# Altium PCB PCB1.PcbDoc
Units mil, origin at the board's own origin, x right, y up, seen from the top; angles counter-clockwise.
Board outline 2960 x 1175 mil, 2 copper layers (Top Layer, Bottom Layer); 16 components, 20 nets, 96 pads, 1 vias.
Unrouted connection lines stored in the file: 4.
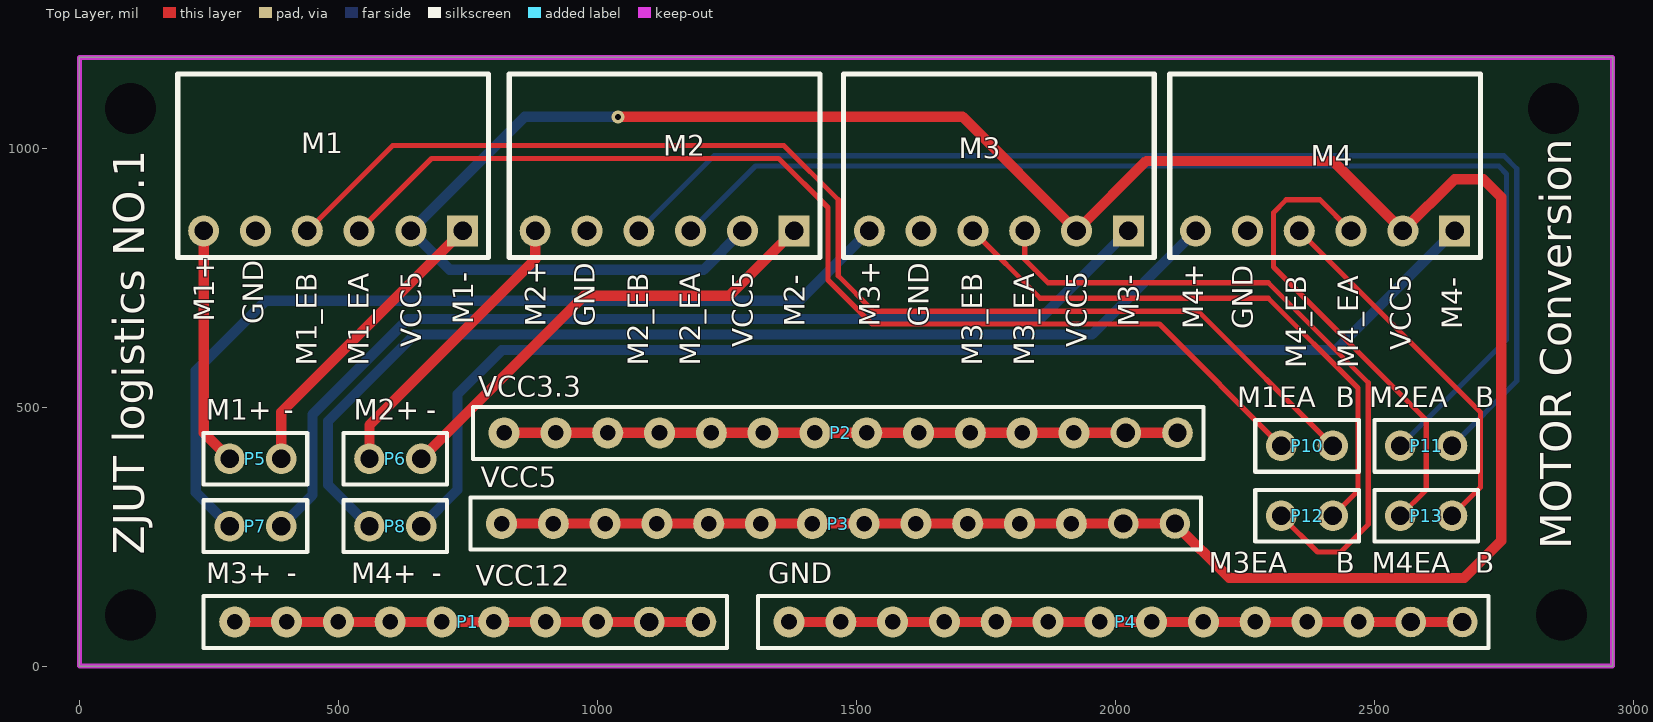
[diagram p0: Top Layer view]
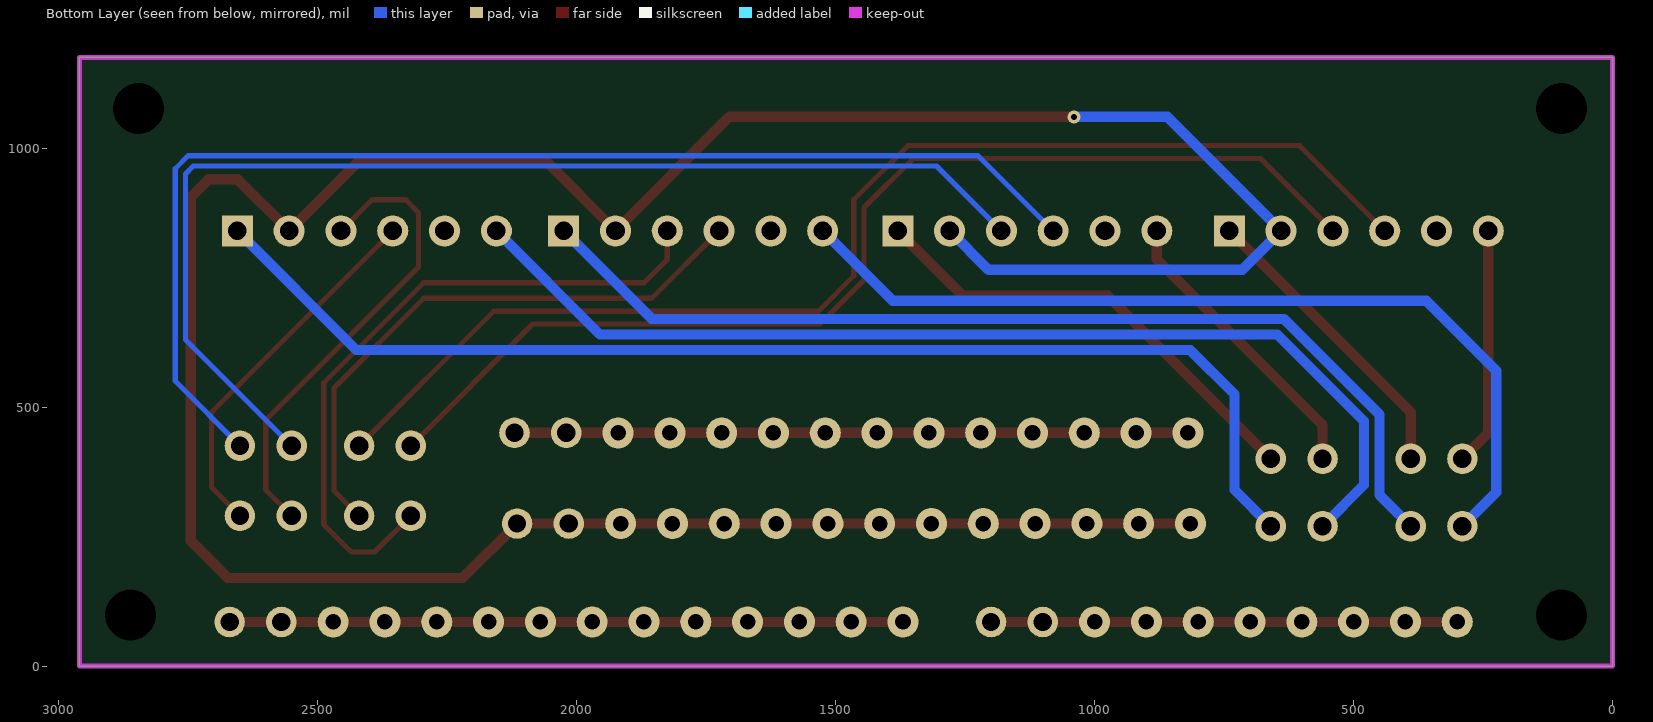
[diagram p1: Bottom Layer view, seen from below]

## Layer stack, top to bottom
Top Solder: solder mask 0.4, Solder Resist, Dk 3.5
Top Layer: signal copper 1.4
Dielectric 1: dielectric 12.6, FR-4, Dk 4.8
Bottom Layer: signal copper 1.4
Bottom Solder: solder mask 0.4, Solder Resist, Dk 3.5

## Board outline
0,0 2960,0 2960,1175 0,1175

## Design rules (kind name [scope] priority, off if disabled: settings)
Clearance [All] p1: gap=10 ignorepadtopadclearanceinfootprint=FALSE except(0: Arc-Hole Track-Hole SMDPad-Hole THPad-Hole Via-Hole Fill-Hole Poly-Hole Region-Hole Text-Hole)
PolygonConnect [All] p1: thpad.connectstyle=Direct thpad.reliefconductorwidth=10 thpad.reliefentries=4 thpad.polygonreliefangle="90 Angle" thpad.airgapwidth=10 smdpad.connectstyle=Relief smdpad.reliefconductorwidth=10 smdpad.reliefentries=4 smdpad.polygonreliefangle="90 Angle" smdpad.airgapwidth=10 via.connectstyle=Direct via.reliefconductorwidth=10 via.reliefentries=4 via.polygonreliefangle="90 Angle" via.airgapwidth=10
RoutingVias [All] p1: holewidth=28 width=50 viastyle="Through Hole" minholewidth=28 minwidth=50 maxholewidth=28 maxwidth=50
SolderMaskExpansion [All] p1: expansion=4 istentingtop=FALSE
Width [All] p1: maxlimit=40 minlimit=5 preferedwidth=10 minimp=50.000000 maximp=50.000000 favimp=50.000000
30 further rules are at their usual default settings.

## Components (designator, comment, footprint, x,y, rotation, side; value= is the part's Value field where it differs from the comment)
M1 "motor" Header6 1130,-111.85 r180 top
M2 "motor" Header6 1770,-111.85 r180 top
M3 "motor" Header6 2415,-111.85 r180 top
M4 "motor" Header6 3045,-111.85 r180 top
P1 "HEADER_10_10" HDR1X10_10 1200,85 r180 top
P2 "HEADER_10" HDR1X10 2120,450 r180 top
P3 "HEADER_10" HDR1X10 2115,275 r180 top
P4 "HEADER_10" HDR1X10 2670,85 r180 top
P5 "HEADER_2" HDR1X2 290,400 r0 top
P6 "HEADER_2" HDR1X2 560,400 r0 top
P7 "HEADER_2" HDR1X2 290,270 r0 top
P8 "HEADER_2" HDR1X2 560,270 r0 top
P10 "HEADER_2" HDR1X2 2320,425 r0 top
P11 "HEADER_2" HDR1X2 2550,425 r0 top
P12 "HEADER_2" HDR1X2 2320,290 r0 top
P13 "HEADER_2" HDR1X2 2550,290 r0 top

## Footprints (in the part's own frame and the unit in brackets; to place one, negate y for a bottom-side part, rotate by r counter-clockwise, add the part's x,y. Pads: shape width x height; smd on the part's side, far side on the other; paste and mask are expansions set on the pad)
HDR1X2 [mm]
  round 1.5 hole 0.9: 1(0,0) 2(2.54,0)
  silkscreen extent -1.27,-1.27 3.81,1.27
HDR1X10 [mil]
  round 59.06 hole 35.43: 1(0,0) 2(100,0)
  round 60 hole 30: 3(200,0) 4(300,0) 5(400,0) 6(500,0) 7(600,0) 8(700,0) 9(800,0) 10(900,0) 11(1000,0) 12(1100,0) 13(1200,0) 14(1300,0)
  silkscreen extent -50,-50 1360,50
HDR1X10_10 [mil]
  round 59.06 hole 35.43: 1(0,0) 2(100,0)
  round 60 hole 30: 3(200,0) 4(300,0) 5(400,0) 6(500,0) 7(600,0) 8(700,0) 9(800,0) 10(900,0)
  silkscreen extent -50,-50 960,50
Header6 [mil]
  rect 60x60 hole 36: 1(390,-951.85)
  round 60 hole 36: 2(490,-951.85) 3(590,-951.85) 4(690,-951.85) 5(790,-951.85) 6(890,-951.85)
  silkscreen extent 340,-1255 940,-901

## Free pads (board coordinates)
  round 60 hole 98.43: 7(98.43,98.43) 7(98.43,1076.57) 7(2845.83,1076.57) 7(2861.57,98.43)

## Via types
v1: diameter 25.59, hole 11.81, Top Layer to Bottom Layer, 1 vias

## Nets (pads, with @x,y where several pads share a name; then routed paths per layer and width w, separated by ;. In a path a pad name is that pad's centre, name@x,y a point inside that pad or via, vN(x,y) a via of type N, cw(c..) or ccw(c..) an arc to the next point about the centre after c; other vN are vias at no path point)
GND: M1.5 M2.5 M3.5 M4.5 P4.1 P4.2 P4.3 P4.4 P4.5 P4.6 P4.7 P4.8 P4.9 P4.10 P4.11 P4.12 P4.13 P4.14 | length 1300
  Top Layer w20: P4.14 P4.13 P4.12 P4.11 P4.10 P4.9 P4.8 P4.7 P4.6 P4.5 P4.4 P4.3 P4.2 P4.1
motor1+: M1.6 P5.1 | length 460.7
  Top Layer w20: M1.6 240,450 P5.1
motor1-: M1.1 P5.2 | length 585
  Top Layer w20: P5.2 390,490 M1.1
motor1_EA: M1.3 P10.1 | length 2149.9
  Top Layer w10: M1.3 680,980 1350,980 1445,885 1445,745 1530,660 2085,660 P10.1
motor1_EB: M1.4 P10.2 | length 2374.5
  Top Layer w10: M1.4 605,1005 1360,1005 1465,900 1465,753.28 1533.28,685 2160,685 P10.2
motor2+: M2.6 P6.1 | length 572.5
  Top Layer w20: P6.1 560,465 880,785 M2.6
motor2-: M2.1 P6.2 | length 902.3
  Top Layer w20: P6.2 975,715 1255,715 M2.1
motor2_EA: M2.3 P11.1 | length 2242.9
  Bottom Layer w10: M2.3 1305,965 2740,965 2755,950 2755,630 P11.1
motor2_EB: M2.4 P11.2 | length 2352.2
  Bottom Layer w10: M2.4 1225,985 2750,985 2775,960 2775,550 P11.2
motor3+: M3.6 P7.1 | length 1738.8
  Bottom Layer w20: P7.1 225,335 225,570 360,705 1390,705 M3.6
motor3-: M3.1 P7.2 | length 1961.9
  Bottom Layer w20: P7.2 450,330 450,485 635,670 1855,670 M3.1
motor3_EA: M3.3 P12.1 | length 1309.8
  Top Layer w10: M3.3 1825,785 1870,740 2295,740 2488.32,546.68 2488.32,273.32 2435,220 2390,220 P12.1
motor3_EB: M3.4 P12.2 | length 1135.7
  Top Layer w10: M3.4 1855,710 2295,710 2468.32,536.68 2468.32,338.32 P12.2
motor4+: M4.6 P8.1 | length 2062.9
  Bottom Layer w20: P8.1 480,350 480,472.57 647.43,640 1955,640 M4.6
motor4-: M4.1 P8.2 | length 2339.5
  Bottom Layer w20: P8.2 730,340 730,525 815,610 2425,610 M4.1
motor4_EA: M4.3 P13.1 | length 913.1
  Top Layer w10: M4.3 2395,900 2330,900 2305,875 2305,770 2600,475 2600,340 P13.1
motor4_EB: M4.4 P13.2 | length 717.8
  Top Layer w10: M4.4 2705,490 2705,345 P13.2
VCC3.3: P2.1 P2.2 P2.3 P2.4 P2.5 P2.6 P2.7 P2.8 P2.9 P2.10 P2.11 P2.12 P2.13 P2.14 | length 1300
  Top Layer w20: P2.14 P2.13 P2.12 P2.11 P2.10 P2.9 P2.8 P2.7 P2.6 P2.5 P2.4 P2.3 P2.2 P2.1
VCC5: M1.2 M2.2 M3.2 M4.2 P3.1 P3.2 P3.3 P3.4 P3.5 P3.6 P3.7 P3.8 P3.9 P3.10 P3.11 P3.12 P3.13 P3.14 | length 5823.6
  Top Layer w20: P3.14 P3.13 P3.12 P3.11 P3.10 P3.9 P3.8 P3.7 P3.6 P3.5 P3.4 P3.3 P3.2 P3.1 2220,170 2673.28,170 2745,241.72 2745,905 2710,940 2655,940 M4.2 2420,975 2060,975 M3.2 1705,1060 v1(1040,1060)
  Bottom Layer w20: v1(1040,1060) 860,1060 M1.2 715,765 1205,765 M2.2
VCC12: P1.1 P1.2 P1.3 P1.4 P1.5 P1.6 P1.7 P1.8 P1.9 P1.10 | length 900
  Top Layer w20: P1.10 P1.9 P1.8 P1.7 P1.6 P1.5 P1.4 P1.3 P1.2 P1.1

## Keep-outs
Keep-Out Layer:
  the board outline again, w10

## Silkscreen, mask and mechanical layers (free items; w line width, h text height)
Top Overlay:
  text "M1+" at 260,665 h39.37 r90
  text "GND" at 355,660 h39.37 r90
  text "M1-" at 760,660 h39.37 r90
  text "M2+" at 900,655 h39.37 r90
  text "GND" at 995,655 h39.37 r90
  text "M2-" at 1400,655 h39.37 r90
  text "M3+" at 1545,655 h39.37 r90
  text "GND" at 1640,655 h39.37 r90
  text "M3-" at 2045,655 h39.37 r90
  text "M4+" at 2170,650 h39.37 r90
  text "GND" at 2265,650 h39.37 r90
  text "M4-" at 2670,650 h39.37 r90
  text "VCC5" at 660,615 h39.37 r90
  text "VCC5" at 1300,615 h39.37 r90
  text "VCC5" at 1945,615 h39.37 r90
  text "VCC5" at 2570,610 h39.37 r90
  text "M1_EB" at 458.44,580 h39.37 r90
  text "M1_EA" at 558.44,580 h39.37 r90
  text "M2_EB" at 1098.44,580 h39.37 r90
  text "M2_EA" at 1198.44,580 h39.37 r90
  text "M3_EB" at 1743.44,580 h39.37 r90
  text "M3_EA" at 1843.44,580 h39.37 r90
  text "M4_EB" at 2368.44,575 h39.37 r90
  text "M4_EA" at 2468.44,575 h39.37 r90
  text "VCC3.3" at 770,520 h39.37
  text "M1EA" at 2235,500 h39.37
  text "B" at 2425,500 h39.37
  text "M2EA" at 2490,500 h39.37
  text "B" at 2695,500 h39.37
  text "M1+" at 245,475 h39.37
  text "-" at 395,475.32 h39.37
  text "M2+" at 530,475 h39.37
  text "-" at 670,475.32 h39.37
  text "VCC5" at 775,345 h39.37
  text "MOTOR Conversion" at 2880,225 h60 r90
  text "ZJUT logistics NO.1" at 125,215 h60 r90
  text "M3EA" at 2180,180 h39.37
  text "B" at 2425,180 h39.37
  text "M4EA" at 2495,180 h39.37
  text "B" at 2695,180 h39.37
  text "M3+" at 245,160 h39.37
  text "-" at 400,160.32 h39.37
  text "M4+" at 525,160 h39.37
  text "-" at 680,160.32 h39.37
  text "GND" at 1330,160 h39.37
  text "VCC12" at 765,155 h39.37